# Altium PCB Eliot12L-Touch02.PcbDoc
Units mm, origin at the board's own origin, x right, y up, seen from the top; angles counter-clockwise.
Board outline 71.16 x 71.19 mm, 2 copper layers (Top Layer, Bottom Layer), stack 1.569 mm thick; 44 components, 40 nets, 158 pads, 59 vias.
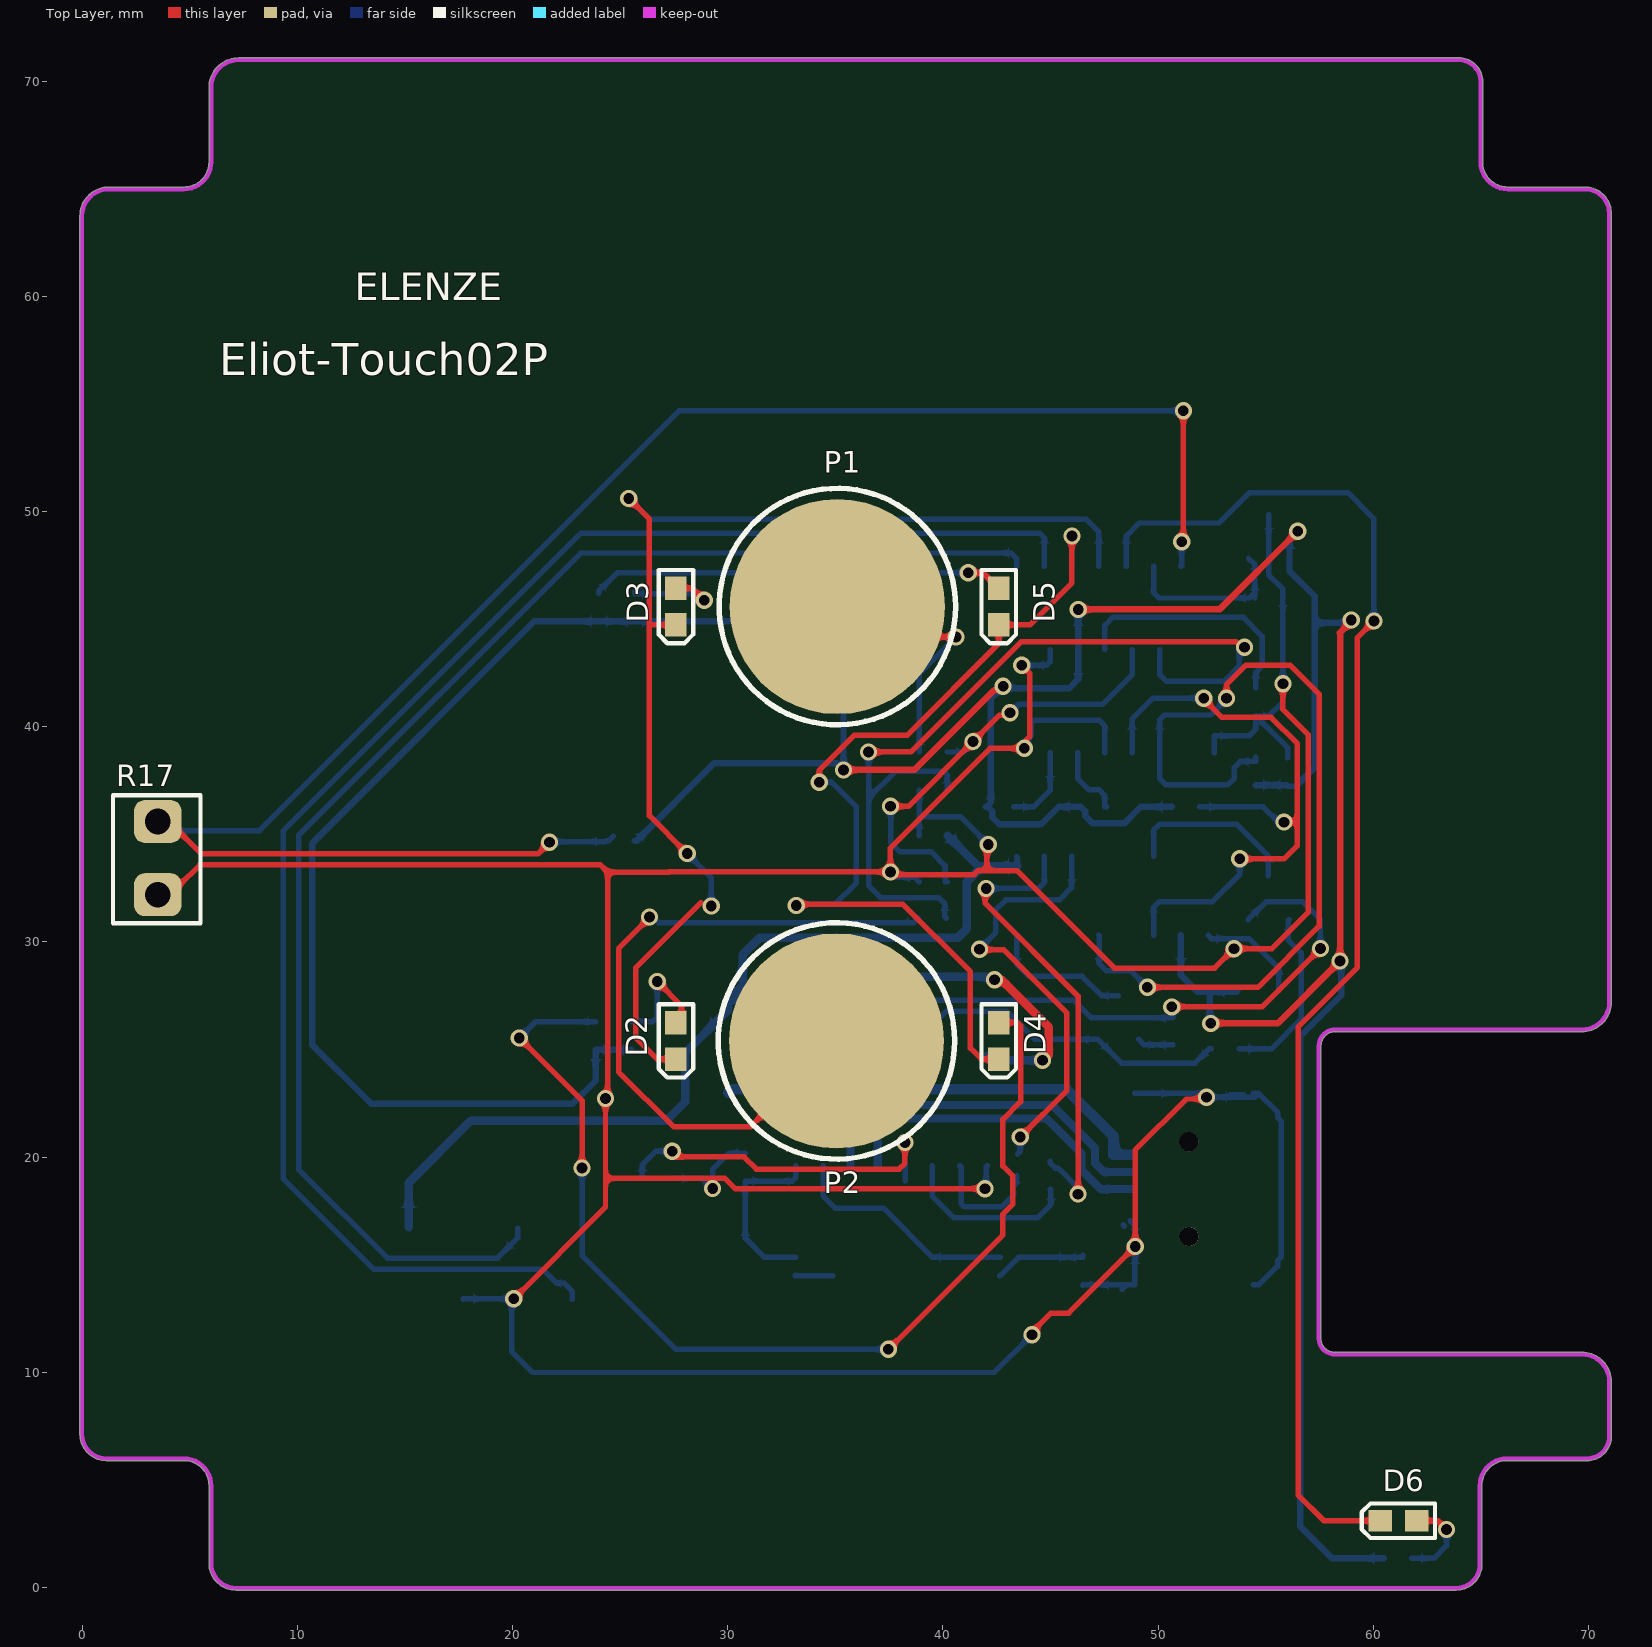
[diagram p0: Top Layer view]
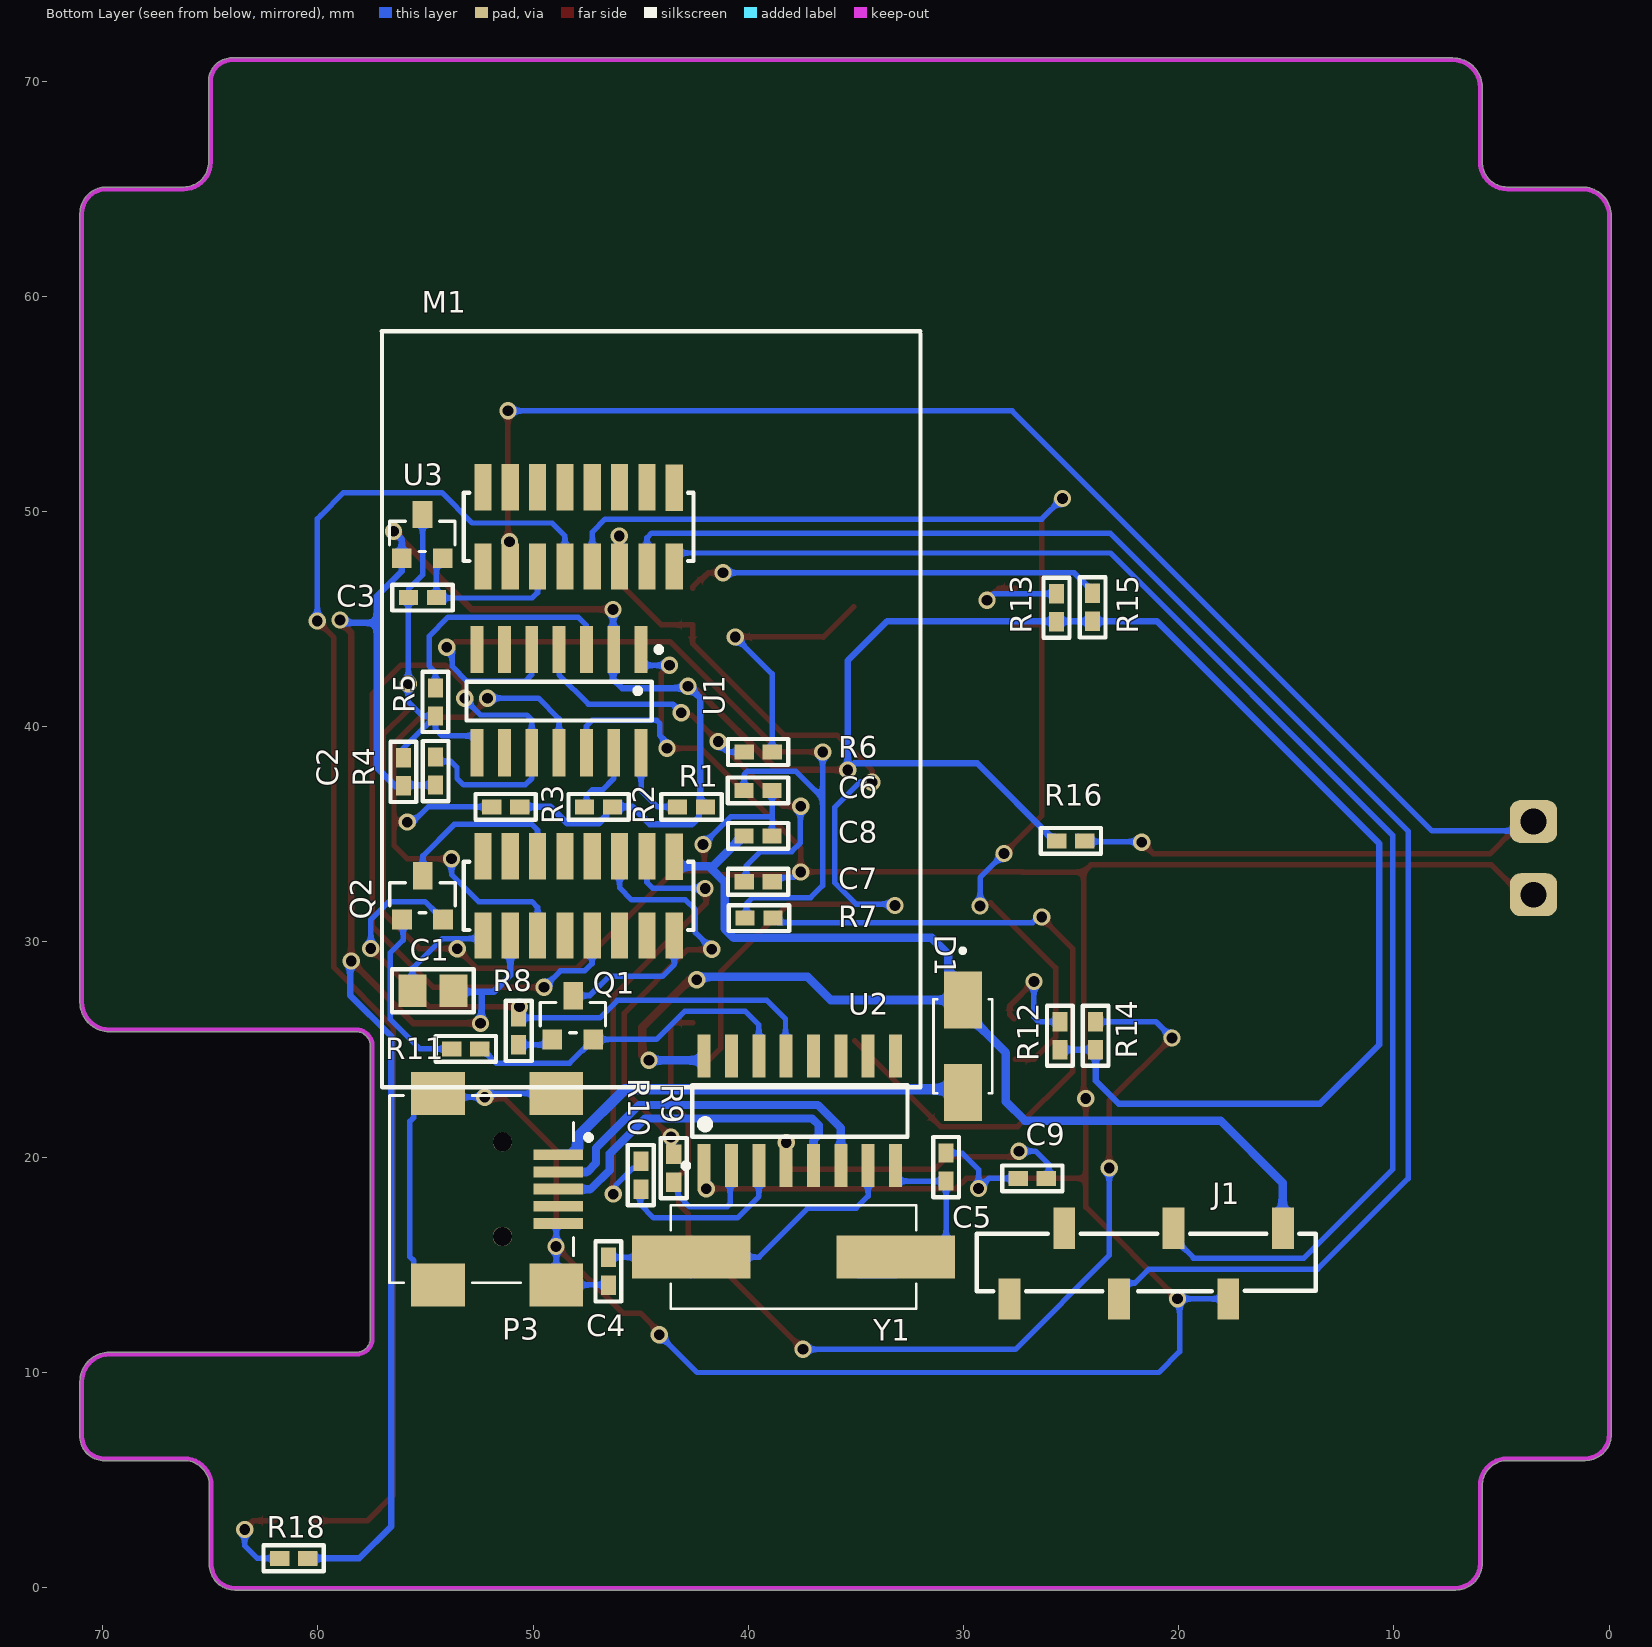
[diagram p1: Bottom Layer view, seen from below]
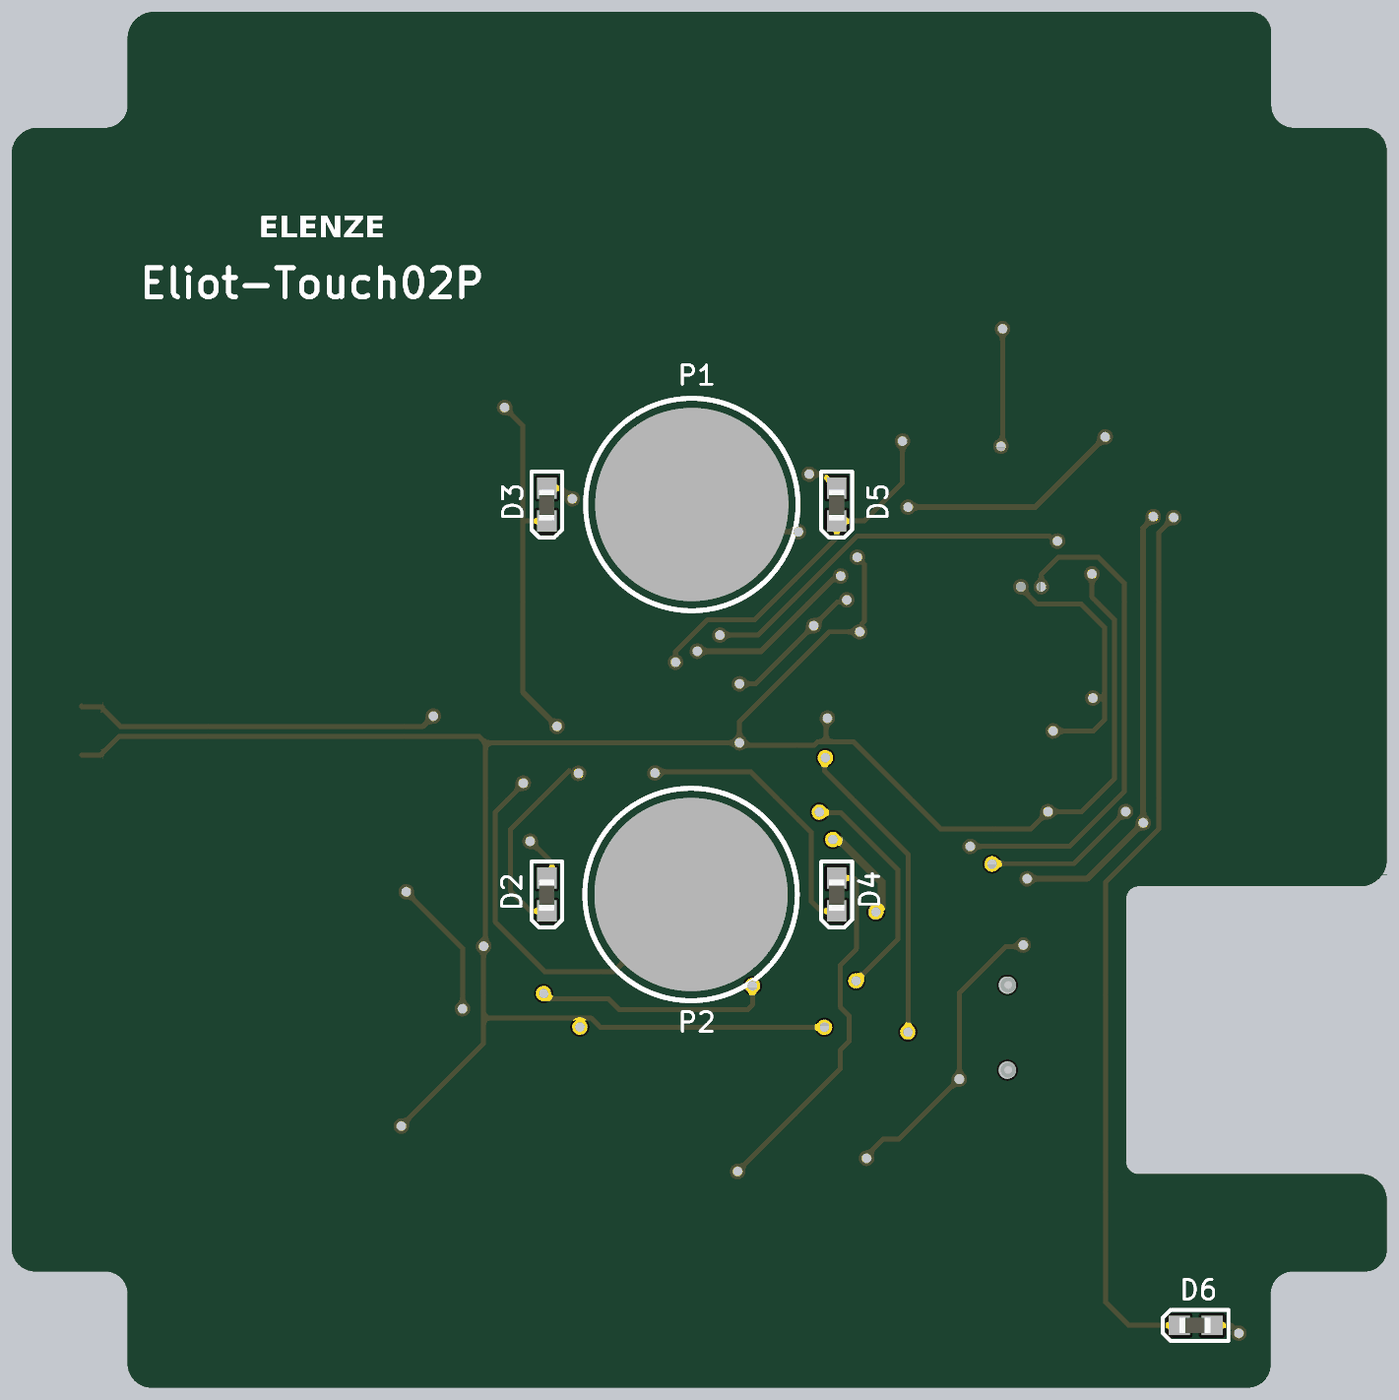
[diagram p2: 3D render of the assembled board from above, using the file's embedded part models]
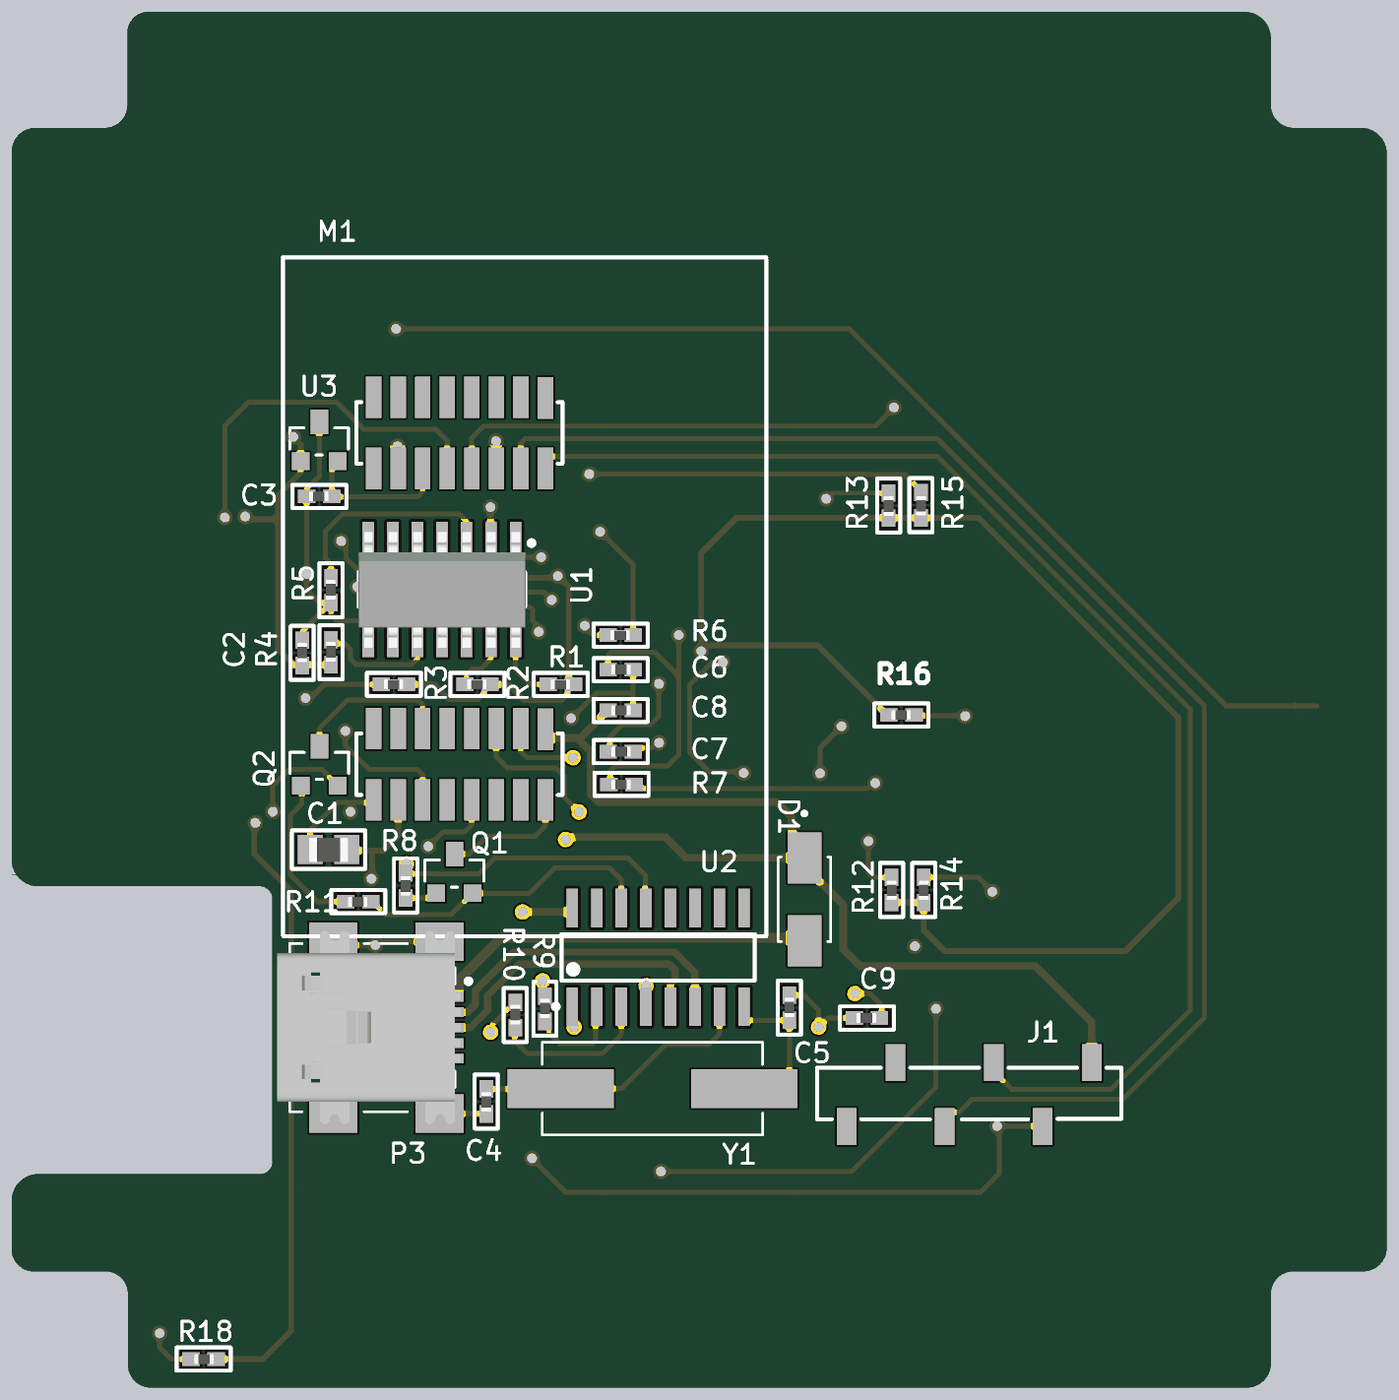
[diagram p3: 3D render of the assembled board from below, using the file's embedded part models]

## Layer stack, top to bottom
Top Solder: solder mask 0.0254, SM-001, Dk 4
Top Layer: signal copper 0.035
Dielectric 1: core 1.4986, Core-043, Dk 4.3
Bottom Layer: signal copper 0.035
Bottom Solder: solder mask 0.0254, SM-001, Dk 4

## Board outline
1.12,5.9 4.73,5.9 cw(c4.73,4.73) 5.9,4.73 5.9,1.124 ccw(c7.141,1.124) 7.141,-0.117 63.853,-0.117 ccw(c63.853,1.071) 65.041,1.071 65.041,4.73 cw(c66.211,4.73) 66.211,5.9 69.93,5.9 ccw(c69.93,7.027) 71.057,7.027 71.057,9.567 ccw(c69.687,9.567) 69.687,10.937 58.228,10.937 ccw(c58.2,10.841) 58.174,10.938 cw(c58.204,11.579) 57.563,11.562 ccw(c57.464,11.581) 57.564,11.581 57.564,25.165 cw(c58.227,25.165) 58.227,25.828 69.687,25.828 ccw(c69.687,27.198) 71.057,27.198 71.057,63.843 ccw(c69.826,63.843) 69.826,65.074 66.245,65.074 cw(c66.245,66.244) 65.075,66.244 65.075,69.991 ccw(c63.992,69.991) 63.992,71.074 7.27,71.074 ccw(c7.27,69.704) 5.9,69.704 5.9,66.244 cw(c4.73,66.244) 4.73,65.074 1.242,65.074 ccw(c1.242,63.732) -0.1,63.732 -0.1,7.12 ccw(c1.12,7.12)

## Design rules (kind name [scope] priority, off if disabled: settings)
Clearance Clearance_4 [All] p1: gap=0.254 ignorepadtopadclearanceinfootprint=FALSE except(0: Arc-Hole Track-Hole SMDPad-Hole THPad-Hole Via-Hole Fill-Hole Poly-Hole Region-Hole Text-Hole)
Clearance Clearance_3 [InComponent('D3')] p2: gap=0 ignorepadtopadclearanceinfootprint=FALSE
Clearance Clearance_2 [InComponent('D2')] p3: gap=0 ignorepadtopadclearanceinfootprint=FALSE
Clearance Clearance_1 [All] p4: gap=0.254 ignorepadtopadclearanceinfootprint=FALSE except(0: Arc-Hole Track-Hole SMDPad-Hole THPad-Hole Via-Hole Fill-Hole Poly-Hole Region-Hole Text-Hole)
Clearance [All] p5: gap=0.15 ignorepadtopadclearanceinfootprint=FALSE
DiffPairsRouting [All] p1: maxlimit=0.254 minlimit=0.254 mostfreqgap=0.254 toplayer_minwidth=0.381 toplayer_maxwidth=0.381 toplayer_prefwidth=0.381 bottomlayer_minwidth=0.381 bottomlayer_maxwidth=0.381 bottomlayer_prefwidth=0.381 maxuncoupledlength=12.7
MinimumSolderMaskSliver [All] p1: minsoldermaskwidth=0
PolygonConnect [All] p1: connectstyle=Relief reliefconductorwidth=0.254 reliefentries=4 polygonreliefangle="90 Angle" airgapwidth=0.254
RoutingVias [All] p1: holewidth=0.25 width=0.5 viastyle="Through Hole" minholewidth=0.25 minwidth=0.5 maxholewidth=0.25 maxwidth=0.5
SilkToSilkClearance [All] p1: silktosilkclearance=0
SilkToSolderMaskClearance [IsPad] p1: minsilkscreentomaskgap=0 clearancetoexposedcopper=TRUE
SolderMaskExpansion [All] p1: expansion=0.102 istentingtop=FALSE
Width [All] p1: maxlimit=1 minlimit=0.254 preferedwidth=0.254 minimp=50.000000 maximp=50.000000 favimp=50.000000
26 further rules are at their usual default settings.

## Classes and differential pairs
differential pair UD: +UD_P -UD_N

## Components (designator, comment, footprint, x,y, rotation, side; value= is the part's Value field where it differs from the comment)
C1 "Cap" 0805 54.659,27.725 r180 bottom value=1uF
C2 "Cap" 0402 56.026,37.903 r270 bottom value=100nF
C3 "Cap" 0402 55.14,45.998 r180 bottom value=100nF
C4 "Cap" 0402 46.501,14.69 r90 bottom value=22pF
C5 "Cap" 0402 30.814,19.539 r270 bottom value=22pF
C6 "Cap" 0402 39.549,37.036 r0 bottom value=10pF
C7 "Cap" 0402 39.546,32.794 r0 bottom value=10pF
C8 "Cap" 0402 39.548,34.927 r0 bottom value=100nF
C9 "Cap" 0402 26.803,19.009 r180 bottom value=10nF
D1 "US1M-13-F" DIO_ES1J 30.028,25.151 r270 bottom
D2 "LED" DO603 27.593,25.401 r270 top
D3 "LED" DO603 27.593,45.58 r270 top
D4 "LED" DO603 42.593,25.401 r270 top
D5 "LED" DO603 42.593,45.58 r270 top
D6 "LED" DO603 61.163,3.104 r180 top
J1 "HEADER1x6" HDR_1X6_2.54_SMT 15.16,16.693 r0 bottom
M1 "Elemo12" Elemo12_No_screw 45.599,41.859 r90 bottom
P1 "CapacitivePad" TouchPad10x10 35.093,45.58 r0 top
P2 "CapacitivePad" TouchPad10x10 35.054,25.401 r0 top
P3 "USB B" USB_MINI_SMD 51.677,18.345 r270 bottom
Q1 "SS8050" SOT-23 49.104,25.467 r180 bottom
Q2 "SS8050" SOT-23 56.09,31.038 r180 bottom
R1 "Res" 0402 42.641,36.276 r180 bottom value=10K
R2 "Res" 0402 46.959,36.276 r180 bottom value=10K
R3 "Res" 0402 51.277,36.276 r180 bottom value=10K
R4 "Res" 0402 54.533,37.939 r270 bottom value=10K
R5 "Res" 0402 54.537,41.149 r270 bottom value=510K
R6 "Res" 0402 39.546,38.824 r180 bottom value=200
R7 "Res" 0402 39.503,31.103 r180 bottom value=200
R8 "Res" 0402 50.67,25.868 r90 bottom value=10K
R9 "Res" 0402 43.464,19.486 r270 bottom value=470
R10 "Res" 0402 44.996,19.163 r270 bottom value=470
R11 "Res" 0402 53.123,25.03 r180 bottom value=10K
R12 "Res" 0402 25.526,25.64 r90 bottom value=1K
R13 "Res" 0402 25.681,45.527 r90 bottom value=1K
R14 "Res" 0402 23.862,25.64 r90 bottom value=1K
R15 "Res" 0402 24.006,45.544 r90 bottom value=1K
R16 "Res" 0402 25.014,34.693 r180 bottom value=10K
R17 "LDR" LDR 93.003,-19.37 r90 top
R18 "Res" 0402 61.126,1.36 r0 bottom value=1K
U1 "TS04" SO_14N 48.793,41.186 r270 bottom
U2 "CH340G" SO_16N 37.607,22.152 r90 bottom
U3 "MCP9700T-E/TT" SOT-23 56.102,47.825 r180 bottom
Y1 "XTAL" xtal-smd 37.903,15.358 r180 bottom

## Footprints (in the part's own frame and the unit in brackets; to place one, negate y for a bottom-side part, rotate by r counter-clockwise, add the part's x,y. Pads: shape width x height; smd on the part's side, far side on the other; paste and mask are expansions set on the pad)
0402 [mm] "Chip Resistor, 2-Leads, Body 1.0x0.5mm, IPC Medium Density"
  rect 0.9x0.7 smd mask+0.15: 1(-0.65,0) 2(0.65,0)
  Top Layer pour cut-out: -0.508,0.889 0.508,0.889 0.508,-0.889 -0.508,-0.889
  silkscreen extent -1.4,-0.6 1.4,0.6, body extent -0.53,-0.25 0.47,0.25, height 0.27
0805 [mm] "Chip Resistor, 2-Leads, Body 2.0x1.2mm, IPC Medium Density"
  rect 1.3x1.5 smd mask+0.15: 1(-0.95,0) 2(0.95,0)
  Top Layer pour cut-out: -0.635,1.27 -0.635,-1.27 0.635,-1.27 0.635,1.27
  silkscreen extent -1.9,-1 1.9,1, body extent -1,-0.64 1,0.62, height 0.47
DIO_ES1J [mm]
  rect 2.65x1.75 smd: A(2.15,0) K(-2.15,0)
  silkscreen extent -4.54,-1.36 2.19,1.36
DO603 [mm] "Chip Resistor, 2-Leads, Body 1.6x0.8mm, IPC Medium Density"
  rect 1.1x1 smd mask+0.15: 1(-0.85,0) 2(0.85,0)
  Top Layer pour cut-out: -0.635,1.016 0.635,1.016 0.635,-1.016 -0.635,-1.016
  silkscreen extent -1.7,-0.8 1.7,0.8, body extent -0.77,-0.41 0.83,0.4, height 0.37
Elemo12_No_screw [mm]
  rect 2.15x0.8 smd: 1(-11.557,-2.159) 2(-7.907,-2.159) 3(-11.557,-0.889) 4(-7.874,-0.889) 5(-11.557,0.381) 6(-7.874,0.381) 7(-11.557,1.651) 8(-7.874,1.651) 9(-11.557,2.921) 10(-7.874,2.921) 11(-11.557,4.191) 12(-7.874,4.191) 13(-11.557,5.461) 14(-7.874,5.461) 15(-11.557,6.731) 16(-7.874,6.731) 17(5.588,-2.159) 18(9.238,-2.159) 19(5.588,-0.889) 20(9.271,-0.889) 21(5.588,0.381) 22(9.271,0.381) 23(5.588,1.651) 24(9.271,1.651) 25(5.588,2.921) 26(9.271,2.921) 27(5.588,4.191) 28(9.271,4.191) 29(5.588,5.461) 30(9.271,5.461) 31(5.588,6.731) 32(9.271,6.731)
  silkscreen extent -18.62,-13.6 16.51,11.43
HDR_1X6_2.54_SMT [mm]
  rect 1.02x1.91 smd: 1(0,0) 2(2.54,3.29) 3(5.08,0) 4(7.62,3.29) 5(10.16,0) 6(12.7,3.29)
  silkscreen extent -1.52,0.25 14.22,2.92
LDR [mm]
  rrect50% 2x2.2 hole 1.2: 1(51.563,89.487) 2(54.963,89.487)
  silkscreen extent 50.24,87.5 56.18,91.57, body extent 50.7,87.53 55.73,91.55, height 5.04
SO_14N [mm] "SOIC, 14-Leads, Body 8.6x3.9mm (max), Pitch 1.27mm, IPC Medium Density"
  rect 2.2x0.6 smd mask+0.15: 1(-2.4,3.81) 2(-2.4,2.54) 3(-2.4,1.27) 4(-2.4,0) 5(-2.4,-1.27) 6(-2.4,-2.54) 7(-2.4,-3.81) 8(2.4,-3.81) 9(2.4,-2.54) 10(2.4,-1.27) 11(2.4,0) 12(2.4,1.27) 13(2.4,2.54) 14(2.4,3.81)
  silkscreen extent -2.52,-4.3 0.9,4.76, body extent -2.97,-4.32 3.03,4.33, height 1.8
SO_16N [mm] "SOIC, 16-Leads, Body 9.9x3.9mm (max), Pitch 1.27mm, IPC Medium Density"
  rect 2x0.6 smd mask+0.15: 1(-2.55,4.445) 2(-2.55,3.175) 3(-2.55,1.905) 4(-2.55,0.635) 5(-2.55,-0.635) 6(-2.55,-1.905) 7(-2.55,-3.175) 8(-2.55,-4.445) 9(2.55,-4.445) 10(2.55,-3.175) 11(2.55,-1.905) 12(2.55,-0.635) 13(2.55,0.635) 14(2.55,1.905) 15(2.55,3.175) 16(2.55,4.445)
  silkscreen extent -2.67,-5 1.2,5.42, body extent -2,-5 2,5, height 1.75
SOT-23 [mil]
  rect 36x36 smd: 1(0,0) 2(75,0)
  rect 36x50 smd: 3(38,80)
  silkscreen extent -22,12 97,68
TouchPad10x10 [mm]
  round 10 smd mask+0.102: 1(0,0)
  silkscreen extent -5.49,-5.49 5.49,5.49
USB_MINI_SMD [mm]
  rect 0.5x2.3 smd: 1(-1.768,2.854) 2(-0.968,2.854) 3(-0.168,2.854) 4(0.632,2.854) 5(1.432,2.854)
  rect 2x2.5 smd: SH1(-4.618,2.754) SH2(4.282,2.754) SH3(-4.618,-2.746) SH4(4.282,-2.746)
  round 0.9 hole 0.9 unplated: ""(-2.368,0.254) ""(2.032,0.254)
  silkscreen extent -4.52,-5 4.18,4.35, body extent -5.17,-5.64 4.83,3.86, height 3.9
xtal-smd [mm]
  rect 5.5x2 smd: 1(-4.75,0) 2(4.75,0)
  silkscreen extent -5.7,-2.4 5.7,2.4

## Part data
C1 C2 C3 C4 C5 C6 C7 C8 C9: "Capacitor", LatestRevisionDate=17-Jul-2002, LatestRevisionNote="Re-released for DXP Platform.", PackageDescription="Radial Cap, Thru-Hole; 2 Leads; 0.3 in Pin Spacing", PackageReference=RAD-0.3, Published=8-Jun-2000, Publisher="Altium Limited"
D1: "Diode Standard 1000V 1A Surface Mount SMA", Package="DO-214 Diodes Inc.", Availability=Unavailable, MF="Diodes Inc.", MP=US1M-13-F, Price=None, SnapEDA_Link=https://www.snapeda.com/parts/US1M-13-F/Diodes%20Inc./view-part/270779/?ref=snap
D2 D3 D4 D5 D6: "Typical INFRARED GaAs LED", LatestRevisionDate=08-Jul-2005, LatestRevisionNote="Mech Layer 1 removed.", PackageDescription="LED; 2 Leads", PackageReference=LED-0, Published=8-Jun-2000, Publisher="Altium Limited"
J1: "HEADER 1x6"
M1: "Elenze Module ESP-12 Secured with Expanded Analog/Digital IO"
P3: library part A-USBB-M5/SMD, "USB 1.1 connector - style B-Mini, SMD, Female, 5 contacts", Manufacturer="Assmann WSW components", Operating Temp="-55°C ~ 85°C", Rating=1A, Manufacture Part #=A-USBB-M5/SMD, Storage Temp="-55°C ~ 85°C"
Q1 Q2: "NPN General Purpose Amplifier", ComponentLink1Description="Manufacturer Link", ComponentLink1URL=http://www.fairchildsemi.com/, ComponentLink2Description=Datasheet, ComponentLink2URL=http://www.fairchildsemi.com/ds/2N%2F2N3904.pdf, DatasheetVersion=1997, LatestRevisionDate=15-Jan-2003, LatestRevisionNote="PCB Footprint 'BCY-W3/D4.7' replaced", PackageDescription="TO, Flat Index; 3 In-Line, Axial Leads; Body Dia. 4.5mm; Leads 0.51 x 0.48 mm (max)", PackageReference=TO-92A, PackageVersion=Sep-1998, Published=8-Jun-2000, Publisher="Altium Limited"
R1 R2 R3 R4 R5 R6 R7 R8 R9 R10 R11 R12 R13 R14 R15 R16 R18: "Resistor", LatestRevisionDate=17-Jul-2002, LatestRevisionNote="Re-released for DXP Platform.", PackageDescription="Axial Device, Thru-Hole; 2 Leads; 0.3 in Pin Spacing", PackageReference=AXIAL-0.3, Published=8-Jun-2000, Publisher="Altium Limited"
R17: "CdS Cells 520nm 16 ~ 33kOhms @ 10 lux", Package="Radial Advanced Photonix", Availability=Unavailable, MF="Advanced Photonix", MP=PDV-P8103, Price=None, SnapEDA_Link=https://www.snapeda.com/parts/PDV-P8103/Advanced%20Photonix/view-part/558244/?ref=snap
U1: "4-Channel Self Calibration Capacitive Touch Sensor", Manufacturer=touchSEMI, Package=14SOP, Part Number=TS04
U2: "USB to Serial Converter"
U3: "Low-Power Linear Active Thermistor"
Y1: "Crystal Oscillator", LatestRevisionDate=17-Jul-2002, LatestRevisionNote="Re-released for DXP Platform.", PackageDescription="Crystal, Thru-Hole; 2 Leads; Body 3.1 x 8.2 mm (Dia.xH)", PackageReference=R38, Published=8-Jun-2000, Publisher="Altium Limited"

## Via types
v1: diameter 0.8, hole 0.5, Top Layer to Bottom Layer, tented both sides, 43 vias
v2: diameter 0.8, hole 0.5, Top Layer to Bottom Layer, 11 vias
v3: diameter 0.8, hole 0.5, Top Layer to Bottom Layer, tented top, 5 vias

## Nets (pads, with @x,y where several pads share a name; then routed paths per layer and width w, separated by ;. In a path a pad name is that pad's centre, name@x,y a point inside that pad or via, vN(x,y) a via of type N, cw(c..) or ccw(c..) an arc to the next point about the centre after c; other vN are vias at no path point)
+3.3VDD: C1.2 C2.2 M1.13 R1.2 R2.2 R3.2 R4.2 R12.1 R13.1 R14.1 R15.1 R16.1 R18.1 U1.2 U3.1 | length 194.1
  Top Layer w0.254: v1(52.445,26.215) v1@52.451,26.222 ; 58.441,44.357 58.441,44.247 58.451,44.236 ; v1@58.97,44.886 v1(58.97,44.957)
  Top Layer w0.3: v3(35.379,37.989) 38.666,37.989 42.376,41.699 42.481,41.699 42.662,41.88 v3(42.797,41.88) ; v1(46.284,45.448) 52.853,45.448 v1(56.483,49.078) ; v1@52.451,26.222 55.564,26.222 v1(58.451,29.109) 58.451,44.236 ; 58.441,44.357 v1@58.97,44.886
  Bottom Layer w0.254: R16.1 R16.1@25.764,34.693 ; 29.728,44.894 29.732,44.898 ; 35.073,38.295 v3(35.379,37.989) ; R1.2@42.007,36.276 R1.2@42.23,36.499 ; 52.396,27.652 52.42,27.676 ; C1.2@53.66,27.676 C1.2 ; C2.2@55.978,37.289 C2.2@56.026,37.241 ; C2.2 C2.2@56.026,37.241 ; 56.407,37.241 C2.2@56.026,37.241 ; v1@58.833,44.82 v1(58.97,44.957)
  Bottom Layer w0.3: R12.1 R14.1 23.862,23.554 22.785,22.477 13.433,22.477 10.685,25.225 10.685,34.568 21.011,44.894 R15.1 29.728,44.894 ; R16.1@25.764,34.693 29.366,38.295 35.073,38.295 ; 29.732,44.898 33.555,44.898 35.379,43.074 v3(35.379,37.989) ; R1.2 42.007,36.276 42.091,36.276 42.291,36.076 42.291,35.793 42.62,35.464 44.571,35.464 45.383,36.276 R2.2 46.409,36.276 46.609,36.076 46.609,35.853 46.959,35.503 48.42,35.503 49.193,36.276 R3.2 ; R1.2@42.23,36.499 42.23,41.33 v3@42.691,41.791 ; v3@42.797,41.791 45.863,41.791 46.284,42.212 v1(46.284,45.448) ; M1.13 51.06,28.453 51.837,27.676 52.42,27.676 C1.2@53.66,27.676 ; v1@52.396,26.517 52.396,27.652 ; R4.2 C2.2@55.978,37.289 ; 56.407,37.241 57.271,38.105 57.271,44.82 ; v1(56.483,49.078) 56.102,48.697 U3.1 56.102,47.224 57.271,46.055 57.271,44.82 ; v1@58.506,28.881 58.506,27.522 56.598,25.613 56.598,2.836 58.074,1.36 R18.1 ; v1@58.833,44.82 57.271,44.82
+5VDD: C8.2 D1.K J1.1 M1.2 U2.16 | length 63.4
  Top Layer w0.4: v2(42.393,28.247) 42.412,28.228 42.736,28.228 44.921,26.043 44.921,24.731 44.882,24.731 44.648,24.497 v2(44.621,24.497)
  Bottom Layer w0.254: C8.2 C8.2@40.23,34.927 ; M1.2@43.44,33.508 M1.2
  Bottom Layer w0.3: 28.034,23.856 28.096,23.794 ; 41.738,33.419 41.827,33.508
  Bottom Layer w0.4: J1.1@15.174,16.755 15.174,18.813 18.06,21.699 23.71,21.699 27.15,21.699 28.034,22.583 28.034,23.856 28.034,24.857 30.028,26.851 D1.K ; C8.2@40.23,34.927 41.65,33.508 ; 41.738,33.419 41.101,32.781 41.101,30.609 40.685,30.193 31.485,30.193 30.703,29.411 30.703,27.976 D1.K ; 41.827,33.508 M1.2@43.44,33.508 ; U2.16 42.052,24.597 42.152,24.497 v2(44.621,24.497) ; v2(42.393,28.247) 42.267,28.372 37.236,28.372 36.165,27.301 D1.K
CONNECT_LED: D6.2 M1.25 | length 65.4
  Top Layer w0.254: v1(60.027,44.909) 59.26,44.143 59.26,28.813 56.504,26.057 56.504,4.298 57.698,3.104 D6.2
  Bottom Layer w0.254: M1.25 48.52,48.866 49.118,49.464 52.829,49.464 54.238,50.873 58.814,50.873 59.864,49.823 60.027,49.66 v1(60.027,44.909)
DTR: Q2.2 R8.2 U2.13 | length 28.8
  Top Layer w0.254: v2@50.63,26.996 54.847,26.996 v1(57.543,29.692)
  Bottom Layer w0.254: U2.13 38.273,24.733 38.273,26.424 39.134,27.285 46.08,27.285 46.893,26.472 50.67,26.472 R8.2 50.73,26.578 50.73,26.882 v2(50.63,26.982) ; Q2.2 55.023,31.876 56.705,31.876 57.543,31.039 v1(57.543,29.692)
GND: C1.1 C2.1 C3.1 C4.1 C5.1 C6.1 C7.1 C8.1 C9.1 J1.2 M1.15 P3.5 P3.SH1 P3.SH2 P3.SH3 P3.SH4 R5.2 R17.1 U1.1 U1.8 U1.12 U2.1 U3.3 | length 233.5
  Top Layer w0.254: R17.1@3.516,32.623 4.511,32.623 5.471,33.583 24.085,33.583 24.423,33.245 ; v1(20.06,13.416) 24.32,17.677 24.32,19.009 ; 27.263,33.245 24.423,33.245 ; 27.27,33.252 v1(37.56,33.252) ; v2(41.957,18.532) 30.345,18.532 29.868,19.009 24.32,19.009 ; v1(42.107,34.524) 42.045,34.462 42.045,33.313 ; v1(43.658,42.853) 44.037,42.475 44.037,39.553 43.888,39.405 43.888,39.098 v1(43.783,38.994) 42.191,38.994 37.56,34.363 v1(37.56,33.252) ; v1(44.136,11.75) 44.136,11.874 45.011,12.749 45.835,12.749 v1(48.935,15.849) 48.935,20.325 51.311,22.701 52.159,22.701 v1(52.242,22.784) ; v1(55.797,41.991) 55.797,40.807 56.972,39.632 56.972,31.377 55.28,29.685 v1(53.524,29.685) 52.62,28.781 47.962,28.781 43.43,33.313 42.045,33.313 ; 24.32,19.009 v1(24.32,22.725) 24.423,22.828 24.423,33.245 ; v1(37.56,33.252) 37.648,33.164 37.75,33.164 37.786,33.128 40.711,33.128 41.447,33.128 41.631,33.313 42.045,33.313
  Bottom Layer w0.254: J1.2 17.713,13.416 v1(20.06,13.416) ; v1@19.955,13.167 19.955,10.965 20.928,9.992 42.377,9.992 v1@44.062,11.677 ; C9.1 28.832,19.009 v2(29.299,18.542) 29.299,19.421 30.067,20.189 C5.1 ; v1(37.56,33.252) 37.636,33.252 37.888,32.999 38.691,32.999 C7.1 ; C8.1 38.898,35.816 38.898,35.971 38.899,35.972 C6.1 ; 38.997,35.816 40.814,35.816 v1(42.107,34.524) ; v2(41.957,18.532) 42.013,18.588 42.013,19.563 U2.1 ; v1(43.658,42.853) 44.81,42.853 44.983,43.026 U1.1 ; v1(43.783,38.994) 43.783,39.269 44.109,39.595 44.109,40.141 44.258,40.289 47.263,40.289 47.523,40.029 U1.12 ; v1@43.988,11.75 v1(44.136,11.75) ; C4.1 46.524,14.063 P3.SH2 48.923,16.813 P3.5 P3.5@48.7,17.036 ; P3.SH2@48.332,13.863 P3.SH2@48.473,14.004 ; P3.5@48.373,16.854 P3.5@48.431,16.796 ; P3.SH1 51.915,22.963 52.094,22.784 v1(52.242,22.784) P3.SH3@53.353,22.784 ; M1.15 52.475,30.157 53.348,30.157 ; U1.8 52.603,39.578 54.232,39.578 54.537,39.883 R5.2@54.537,40.493 ; P3.SH3@53.353,22.76 P3.SH3@53.353,22.784 ; v1(53.524,29.685) 53.477,29.732 53.477,30.028 53.348,30.157 ; P3.SH3@53.973,22.904 53.353,22.904 P3.SH3@53.353,22.784 ; P3.SH4 54.673,14.063 55.546,14.936 55.546,15.186 55.723,15.363 55.723,21.663 55.546,21.84 55.546,22.09 P3.SH3@54.673,22.963 ; P3.SH3 P3.SH3@54.673,22.963 ; R5.2 R5.2@54.537,40.493 ; U3.3 55.137,47.054 55.79,46.401 C3.1 55.797,45.998 v1(55.797,41.991) 55.797,41.153 55.137,40.493 R5.2@54.537,40.493 ; C1.1 55.609,28.768 54.22,30.157 53.348,30.157 ; C2.1 56.026,39.004 R5.2@54.537,40.493 ; P3.SH3@53.353,22.784 54.494,22.784 P3.SH3@54.673,22.963
GPIO0: M1.12 Q2.3 | length 8.2
  Bottom Layer w0.254: M1.12 49.79,35.196 50.057,35.463 53.664,35.463 55.125,34.002 Q2.3
NetC6_2: C6.2 R7.1 U1.5 | length 41.7
  Top Layer w0.254: v1(36.544,38.825) 38.526,38.825 43.648,43.947 53.609,43.947 53.867,43.689 v1(54.015,43.689)
  Bottom Layer w0.254: v1(36.544,38.825) 36.544,36.678 ; R7.1 40.085,31.171 40.085,31.773 39.798,32.06 37.103,32.06 36.544,32.619 36.544,36.678 ; C6.2 40.199,37.776 40.05,37.925 37.791,37.925 36.544,36.678 ; U1.5 50.063,42.423 50.381,42.105 51.791,42.105 52.145,42.105 53.061,42.105 53.766,42.81 53.766,43.44 v1(54.015,43.689)
NetC7_2: C7.2 R6.1 U1.4 | length 21.9
  Top Layer w0.254: v1(37.56,36.302) 38.394,36.302 v1(41.401,39.308) 42.633,40.541 43.009,40.541 v1(43.113,40.645)
  Bottom Layer w0.254: v1(37.56,36.302) 37.583,36.279 37.583,34.602 37.992,34.193 39.44,34.193 40.1,33.533 40.1,32.794 C7.2 ; R6.1 40.959,38.824 41.401,39.266 v1(41.401,39.308) ; v1(43.113,40.645) 43.511,41.043 47.432,41.043 48.793,42.404 U1.4
NetC9_2: C9.2 U2.4 | length 16.4
  Top Layer w0.254: v2(27.423,20.277) 27.693,20.007 30.761,20.007 31.33,19.438 37.964,19.438 38.234,19.708 v2(38.234,20.683)
  Bottom Layer w0.254: C9.2 26.034,19.128 26.034,19.655 26.656,20.277 v2(27.423,20.277) ; v2(38.234,20.683) 38.234,19.61 U2.4 U2.4@38.242,18.902
NetD1_A: D1.A P3.1 | length 20.6
  Bottom Layer w0.5: D1.A 30.186,23.159 45.735,23.159 47.923,20.971 47.923,20.113 P3.1
NetD2_1: D2.1 R12.2 | length 5.2
  Top Layer w0.254: v1(26.728,28.158) 27.853,27.033 27.853,26.623 D2.1@27.654,26.424
  Bottom Layer w0.254: R12.2 26.506,26.29 26.728,26.512 v1(26.728,28.158)
NetD3_1: D3.1 R13.2 | length 5.3
  Top Layer w0.254: D3.1 28.355,46.43 v1(28.91,45.875)
  Bottom Layer w0.254: R13.2@25.904,46.5 25.681,46.277 R13.2 28.608,46.177 v1(28.91,45.875)
NetD4_1: D4.1 R14.2 | length 50.2
  Top Layer w0.254: v1(20.316,25.541) 23.23,22.627 v1(23.23,19.489) ; v1(37.464,11.072) 42.783,16.391 42.783,17.351 43.244,17.812 43.244,19.119 42.783,19.58 42.783,21.755 43.609,22.581 43.609,26.102 43.46,26.251 D4.1
  Bottom Layer w0.254: v1(20.316,25.541) 21.065,26.29 R14.2 ; v1(23.23,19.489) 23.23,15.435 27.593,11.072 v1(37.464,11.072)
NetD5_1: D5.1 R15.2 | length 19.4
  Top Layer w0.254: v1(41.171,47.152) 41.871,47.152 42.17,46.853 42.22,46.853 42.593,46.48 D5.1
  Bottom Layer w0.254: R15.2 24.006,46.294 24.856,47.144 26.836,47.144 26.844,47.152 v1(41.171,47.152)
NetD6_1: D6.1 R18.2 | length 4.2
  Top Layer w0.254: D6.1 62.998,3.104 v1(63.402,2.7)
  Bottom Layer w0.254: R18.2 62.809,1.36 63.402,1.953 v1(63.402,2.7)
NetM1_29: M1.29 R16.2 R17.2 | length 85
  Top Layer w0.254: R17.2@3.516,35.163 3.579,35.1 4.533,35.1 5.542,34.091 21.177,34.091 v3(21.718,34.632) ; v3(51.094,48.598) 51.171,48.675 v3(51.171,54.675)
  Bottom Layer w0.254: R17.2@3.516,35.163 8.228,35.163 27.74,54.675 v3(51.171,54.675) ; v3(21.718,34.632) 21.749,34.663 24.333,34.663 R16.2 24.464,34.693 R16.2@24.687,34.916 ; M1.29 51.094,47.481 v3(51.094,48.598)
NetP1_1: P1.1 R6.2 | length 12.2
  Top Layer w0.254: P1.1 36.523,44.15 36.543,44.17 v1(40.608,44.17)
  Bottom Layer w0.254: R6.2 38.896,42.458 v1(40.608,44.17)
NetP2_1: P2.1 R7.2 | length 33.2
  Top Layer w0.254: v1@26.37,31.129 24.931,29.69 24.931,23.964 27.483,21.412 31.065,21.412 P2.1
  Bottom Layer w0.254: v1@26.392,31.003 26.447,31.058 26.623,31.058 26.789,30.892 38.642,30.892 R7.2
  other v1: 26.37,31.163
NetQ1_1: Q1.1 R8.1 | length 1.7
  Bottom Layer w0.254: Q1.1 49.353,25.218 R8.1
NetQ2_1: Q2.1 R11.1 | length 8.3
  Bottom Layer w0.254: R11.1 55.263,25.03 56.64,26.407 56.64,29.49 56.044,30.086 56.044,30.992 Q2.1
NetR1_1: R1.1 U1.14 | length 3.8
  Bottom Layer w0.254: R1.1 44.215,36.276 44.983,37.044 U1.14
NetR2_1: R2.1 U1.13 | length 3.4
  Bottom Layer w0.254: U1.13 46.253,37.597 46.786,37.064 47.263,37.064 47.517,36.81 47.517,36.276 R2.1
NetR5_1: R5.1 U1.3 | length 11.5
  Bottom Layer w0.254: U1.3 47.523,44.709 47.904,45.09 53.943,45.09 54.832,44.201 54.832,42.82 54.537,42.525 R5.1
NetR9_2: R9.2 U2.2 | length 5.3
  Bottom Layer w0.254: U2.2 40.841,19.543 40.841,17.837 40.99,17.688 42.726,17.688 43.268,18.23 43.268,18.64 R9.2 ; R9.2@43.434,19.035 R9.2@43.434,19.135
NetR10_2: R10.2 U2.3 | length 8.3
  Bottom Layer w0.254: U2.3 39.512,18.171 40.503,17.18 44.4,17.18 45.019,17.799 45.019,18.49 R10.2
nRST: M1.1 Q1.3 | length 6.6
  Bottom Layer w0.254: M1.1 43.44,28.961 43.999,28.402 46.465,28.402 47.368,27.499 Q1.3
RELAY01: J1.3 M1.17 | length 67.5
  Bottom Layer w0.254: J1.3 20.24,16.248 19.323,15.331 19.323,15.307 14.187,15.307 10.062,19.432 10.062,34.956 23.177,48.071 43.167,48.071 43.44,47.798 M1.17
RELAY02: J1.4 M1.19 | length 74.6
  Bottom Layer w0.254: J1.4 22.78,13.762 22.397,14.145 22.038,14.145 21.384,14.799 13.55,14.799 9.344,19.005 9.344,35.15 23.185,48.991 44.492,48.991 44.71,48.773 M1.19
RTS: Q1.2 R11.2 U2.14 | length 15.9
  Bottom Layer w0.254: U2.14 39.512,26.147 40.142,26.777 42.965,26.777 44.275,25.467 Q1.2 48.303,24.364 51.717,24.364 52.15,24.797 52.15,24.807 52.373,25.03 R11.2
RXD0: M1.6 R9.1 | length 20.4
  Top Layer w0.254: v2(41.695,29.663) 41.722,29.635 41.725,29.638 42.817,29.638 45.762,26.693 45.762,23.101 v2(43.592,20.931)
  Bottom Layer w0.254: v2(41.695,29.663) 42.462,30.43 42.462,31.501 42.92,31.958 45.421,31.958 45.98,32.517 M1.6 ; R9.1 43.592,20.264 v2(43.592,20.931)
Temperature: C3.2 M1.27 U3.2 | length 8.1
  Bottom Layer w0.254: M1.27 49.79,46.233 50.044,45.979 54.24,45.979 C3.2@54.49,46.229 ; U3.2 54.49,47.532 C3.2@54.49,46.229 ; C3.2 C3.2@54.49,46.229
TOUCH_LED1: D4.2 D5.2 M1.21 | length 43.5
  Top Layer w0.254: v1(33.183,31.69) 33.251,31.758 38.127,31.758 41.271,28.614 41.271,25.067 41.787,24.551 D4.2 ; v1(34.253,37.42) 34.253,37.979 35.88,39.606 38.345,39.606 42.593,43.854 D5.2 44.037,44.73 45.993,46.686 v1(45.993,48.86)
  Bottom Layer w0.254: v1(33.183,31.69) 33.251,31.758 34.99,31.758 35.98,32.748 35.98,36.262 34.822,37.42 v1(34.253,37.42) ; M1.21 45.993,47.46 v1(45.993,48.86)
TOUCH_LED2: D2.2 D3.2 M1.23 | length 55.7
  Top Layer w0.254: v1(25.406,50.602) 26.357,49.651 26.357,44.712 ; D2.2 26.723,24.551 25.716,25.558 25.716,28.791 28.738,31.813 ; D3.2@27.593,44.68 D3.2 26.375,44.73 26.357,44.712 ; v1(28.118,34.102) 26.357,35.863 26.357,44.712
  Bottom Layer w0.254: v1@25.412,50.605 26.376,49.641 46.65,49.641 47.25,49.041 M1.23 ; v1(28.118,34.102) 29.23,32.99 v1(29.23,31.673)
TouchPad1: M1.7 R4.1 U1.10 | length 41.6
  Top Layer w0.254: v1(49.498,27.889) 54.635,27.889 57.48,30.733 57.48,41.512 56.135,42.857 54.076,42.857 53.176,41.957 v1(53.176,41.323)
  Bottom Layer w0.254: M1.7 47.262,30.29 47.262,28.995 47.608,28.649 48.738,28.649 v1(49.498,27.889) ; v1(53.176,41.323) 53.176,41.274 52.446,40.543 50.285,40.543 50.063,40.321 U1.10 50.063,37.597 50.368,37.292 53.232,37.292 53.537,37.597 53.537,38.105 53.816,38.384 54.533,38.384 R4.1
TouchPad2: M1.11 R3.1 U1.11 | length 29.4
  Top Layer w0.254: v1(52.122,41.324) 52.122,41.273 52.961,40.434 55.248,40.434 56.464,39.218 56.464,35.591 ; v1(53.791,33.863) 53.801,33.853 55.843,33.853 56.464,34.474 56.464,35.591 ; v1(55.848,35.565) 55.874,35.591 56.464,35.591
  Bottom Layer w0.254: U1.11 48.793,40.366 49.751,41.324 v1(52.122,41.324) ; M1.11 49.79,31.602 50.057,31.869 52.533,31.869 53.791,33.127 v1(53.791,33.863) ; R3.1 54.882,36.276 v1@55.546,35.612
TXD0: M1.4 R10.1 | length 22.2
  Top Layer w0.254: v2(42.007,32.48) 41.955,32.428 41.955,31.801 46.287,27.469 46.287,18.293 v2(46.274,18.28)
  Bottom Layer w0.254: v2(42.007,32.48) 42.019,32.492 44.431,32.492 44.71,32.771 M1.4 ; R10.1 44.996,19.713 45.219,19.49 45.356,19.49 45.368,19.478 45.37,19.478 45.504,19.344 46.17,18.678 46.17,18.384 v2(46.274,18.28)
UD_N: P3.2 U2.6 | length 17
  Bottom Layer w0.381: U2.6 35.702,21.355 36.771,22.424 45.074,22.424 47.071,20.426 47.071,19.719 47.483,19.307 48.817,19.307 P3.2
UD_P: P3.3 U2.5 | length 16
  Bottom Layer w0.381: U2.5 36.972,20.793 36.728,21.036 36.728,21.483 37.034,21.789 44.811,21.789 46.436,20.163 46.436,19.397 47.321,18.513 P3.3
XI: C4.2 U2.7 Y1.1 | length 15.1
  Bottom Layer w0.254: U2.7 34.432,18.189 34.995,17.626 37.227,17.626 39.495,15.358 Y1.1 ; Y1.1@42.642,14.48 43.502,15.34 C4.2 C4.2@46.501,15.44
XO: C5.2 U2.8 Y1.2 | length 10.1
  Bottom Layer w0.254: Y1.2 31.687,15.358 30.814,16.231 C5.2 32.989,18.889 33.162,19.062 U2.8 ; Y1.2@33.165,14.503 33.142,14.48 Y1.2@34.892,14.48
pads on no net: J1.5 J1.6 M1.3 M1.5 M1.8 M1.9 M1.10 M1.14 M1.16 M1.18 M1.20 M1.22 M1.24 M1.26 M1.28 M1.30 M1.31 M1.32 P3. P3.4 U1.6 U1.7 U1.9 U2.9 U2.10 U2.11 U2.12 U2.15

## Keep-outs
Keep-Out Layer:
  lines w0.2: 58.2,10.841 58.204,10.837 ; 58.204,10.837 cw(c58.204,11.579) 57.462,11.579 57.464,11.581 57.464,25.165 cw(c58.227,25.165) 58.227,25.928 68.655,25.928 69.687,25.928 ccw(c69.687,27.198) 70.957,27.198 70.957,28.249 70.957,63.843 ccw(c69.826,63.843) 69.826,64.974 66.245,64.974 cw(c66.245,66.244) 64.975,66.244 64.975,69.991 ccw(c63.992,69.991) 63.992,70.974 7.291,70.974 7.27,70.974 ccw(c7.27,69.704) 6,69.704 6,69.683 6,66.244 cw(c4.73,66.244) 4.73,64.974 1.242,64.974 ccw(c1.242,63.732) 0,63.732 0,7.12 ccw(c1.12,7.12) 1.12,6 4.73,6 cw(c4.73,4.73) 6,4.73 6,1.124 ccw(c7.141,1.124) 7.141,-0.017 63.853,-0.017 ccw(c63.853,1.071) 64.941,1.071 64.941,4.73 cw(c66.211,4.73) 66.211,6 69.93,6 ccw(c69.93,7.027) 70.957,7.027 70.957,8.523 70.957,9.567 ccw(c69.687,9.567) 69.687,10.837 69.04,10.837 58.204,10.837

## Silkscreen, mask and mechanical layers (free items; w line width, h text height)
Top Overlay:
  text "ELENZE" at 12.67,59.404 h2.2
  text "Eliot-Touch02P" at 6.381,56.32 h1.5